# Altium PCB PCB_Input.PcbDoc
Units mil, origin at the board's own origin, x right, y up, seen from the top; angles counter-clockwise.
Board outline 944.88 x 1889.76 mil, 2 copper layers (Top Layer, Bottom Layer); 7 components, 4 nets, 24 pads, 0 vias.
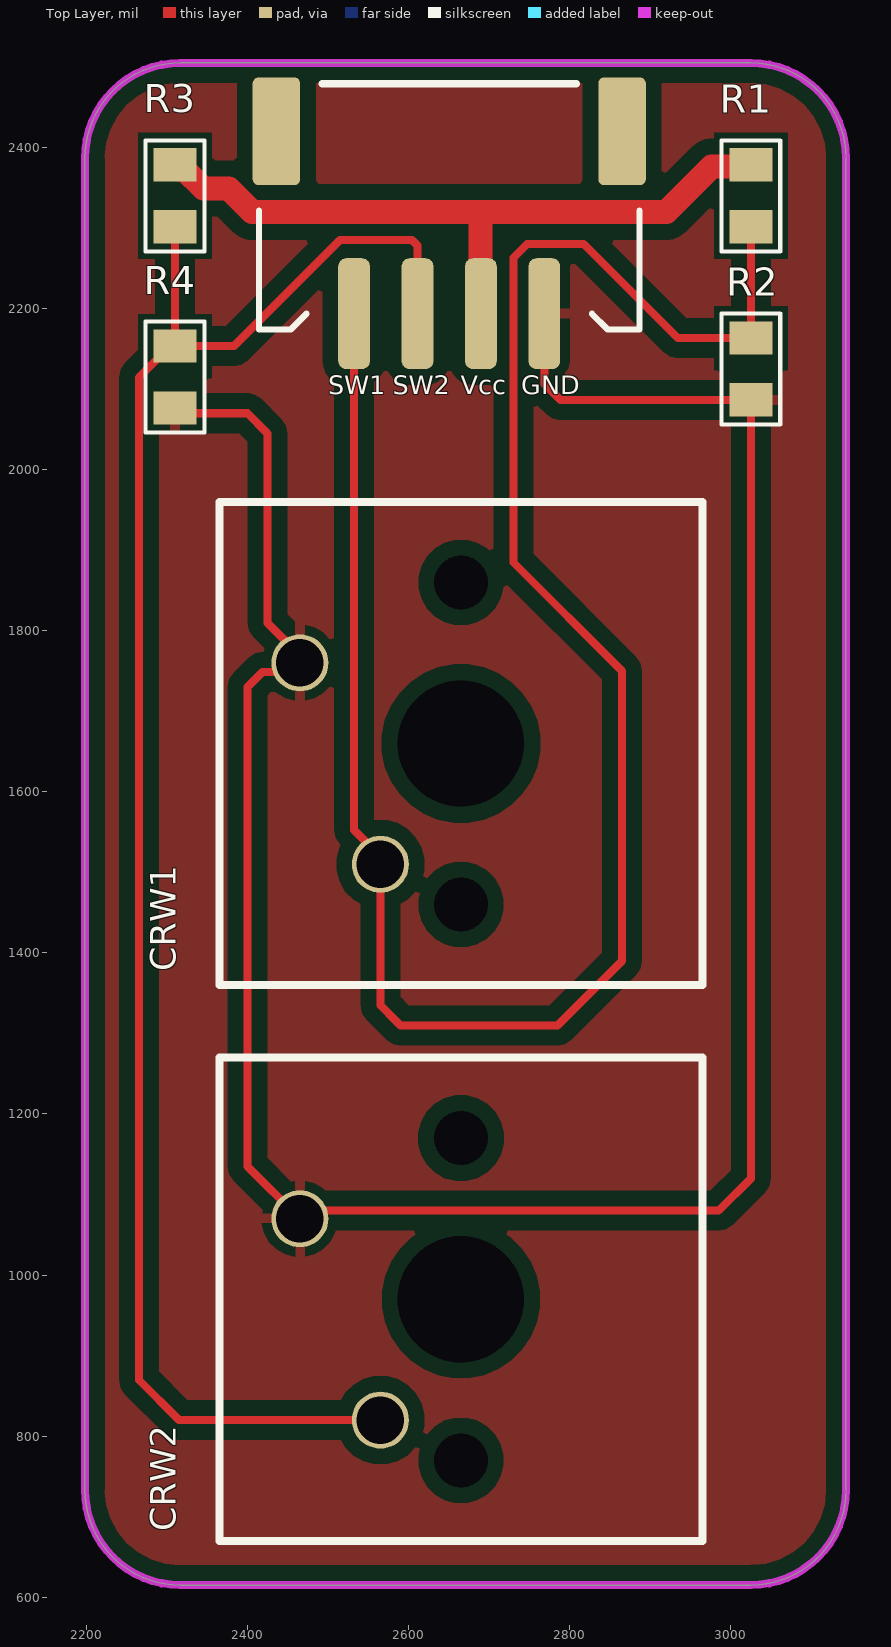
[diagram p0: Top Layer view]
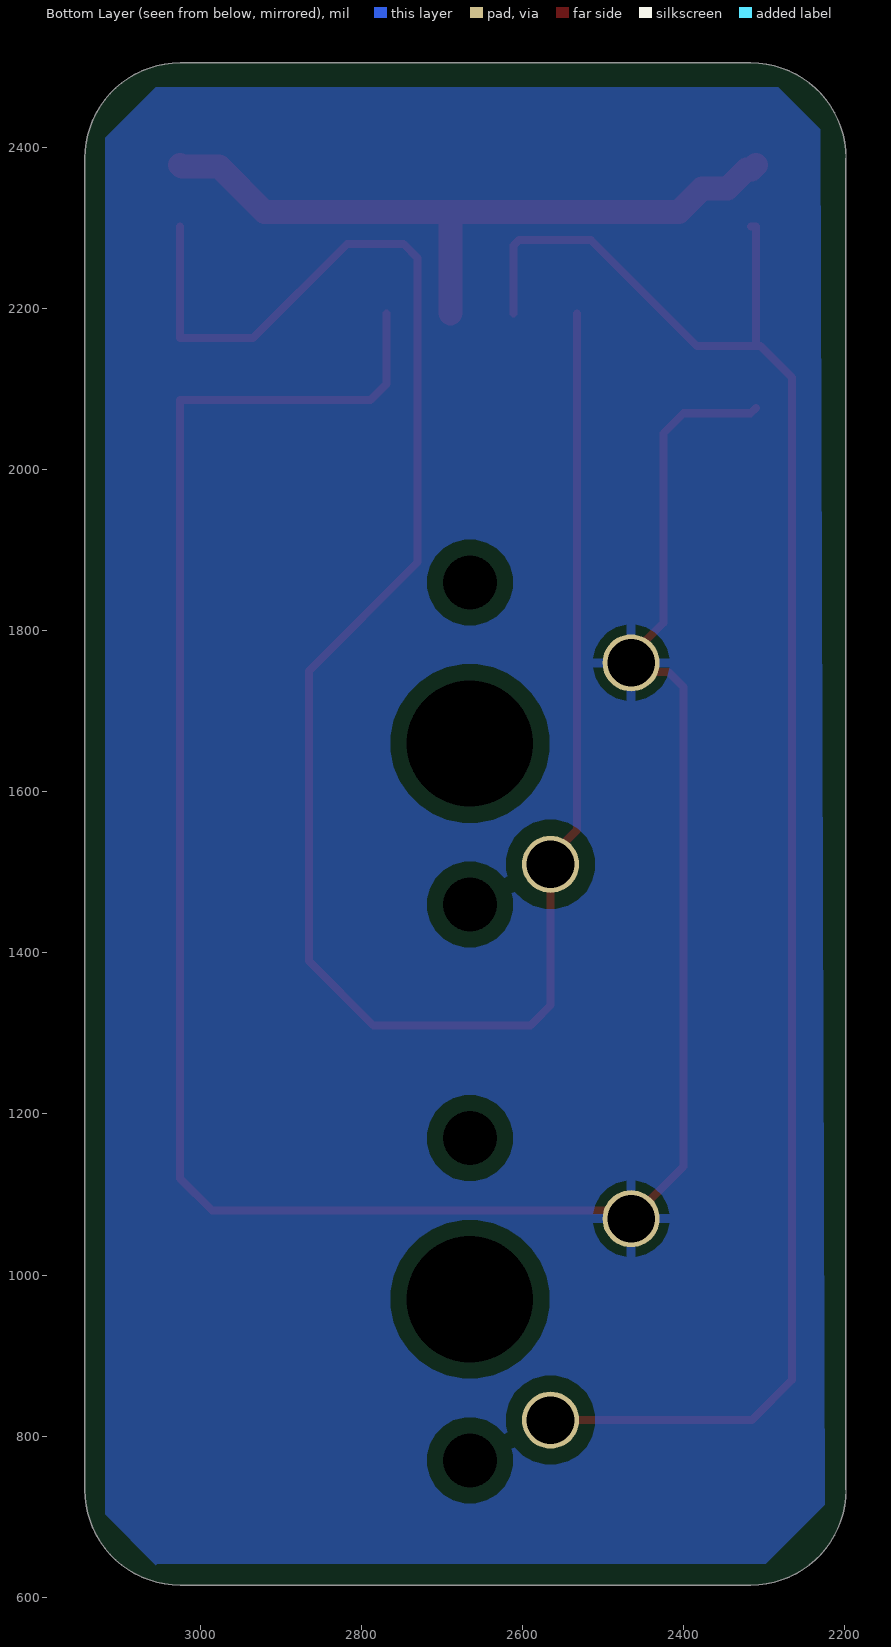
[diagram p1: Bottom Layer view, seen from below]
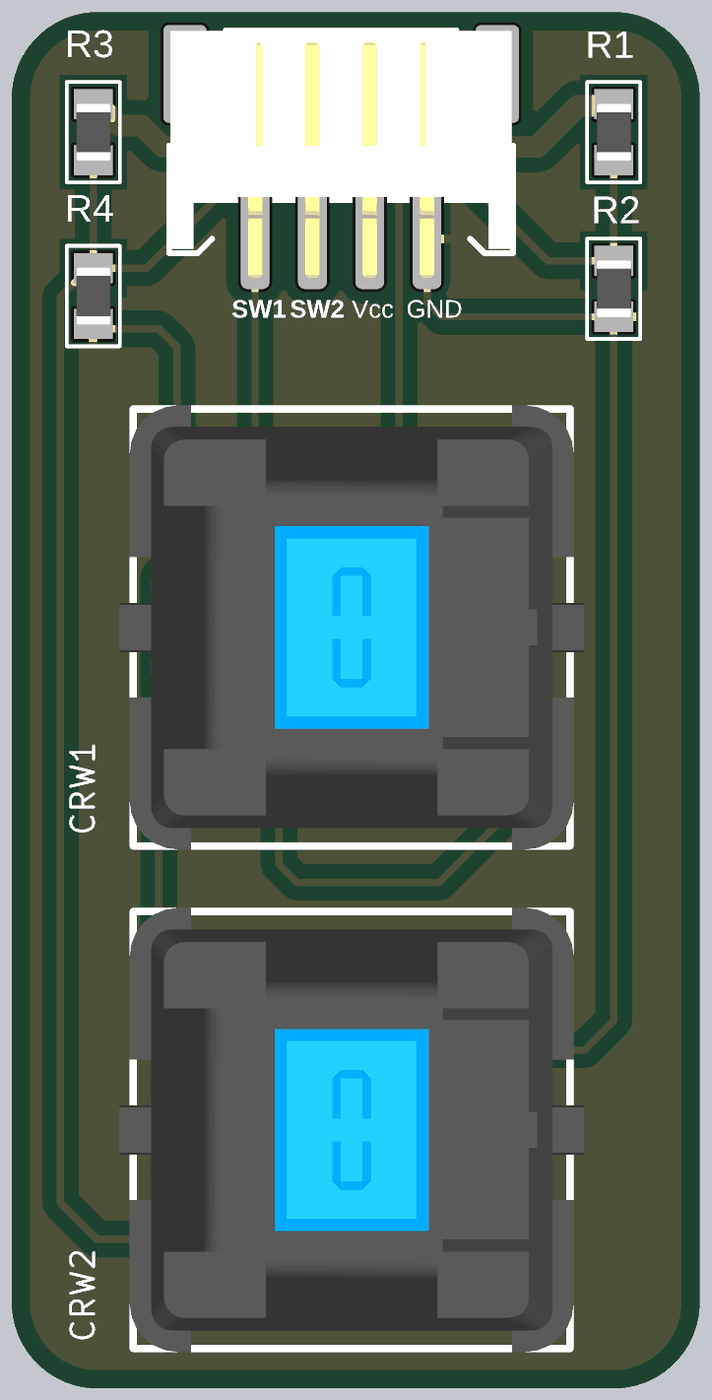
[diagram p2: 3D render of the assembled board from above, using the file's embedded part models]

## Layer stack, top to bottom
Top Solder: solder mask 0.4, Solder Resist, Dk 3.5
Top Layer: signal copper 1.4
Dielectric 1: dielectric 12.6, FR-4, Dk 4.8
Bottom Layer: signal copper 1.4
Bottom Solder: solder mask 0.4, Solder Resist, Dk 3.5

## Board outline
2198.15,733.27 2198.15,2386.81 cw(c2316.26,2386.81) 2316.26,2504.92 3024.92,2504.92 cw(c3024.92,2386.81) 3143.03,2386.81 3143.03,733.27 cw(c3024.92,733.27) 3024.92,615.16 2316.26,615.16 cw(c2316.26,733.27)

## Design rules (kind name [scope] priority, off if disabled: settings)
Clearance Clearance_3 [InComponent('H*')] p1: gap=0 ignorepadtopadclearanceinfootprint=FALSE
Clearance Clearance_2 [InNet('ACL*') OR InNet('ACN*')] p2: gap=13.78 ignorepadtopadclearanceinfootprint=FALSE except(0: Arc-Hole Track-Hole SMDPad-Hole THPad-Hole Via-Hole Fill-Hole Poly-Hole Region-Hole Text-Hole)
Clearance Clearance_1 [InPolygon] p3: gap=19.68 ignorepadtopadclearanceinfootprint=FALSE except(0: Arc-Hole Track-Hole SMDPad-Hole THPad-Hole Via-Hole Fill-Hole Poly-Hole Region-Hole Text-Hole)
Clearance [All] p4: gap=11.81 ignorepadtopadclearanceinfootprint=FALSE except(0: Arc-Hole Track-Hole SMDPad-Hole THPad-Hole Via-Hole Fill-Hole Poly-Hole Region-Hole Text-Hole)
ComponentClearance ComponentClearance_1 [InComponent('M802') OR  InComponent('P104') OR InComponent('Y202') OR InComponent('C101') OR InComponent('P101') OR InComponent('L101') OR  InComponent('S309') OR InComponent('S310') OR InComponent('H*')] p1: gap=0 collisioncheckmode=3 verticalgap=0 showdistances=FALSE
ComponentClearance [All] p2: gap=10 collisioncheckmode=3 verticalgap=10 showdistances=FALSE
Height [All] p1: minheight=0 maxheight=1181.1 prefheight=500
PolygonConnect PolygonConnect_1 [IsVia] p1: connectstyle=Direct reliefconductorwidth=10 reliefentries=4 polygonreliefangle="90 Angle" airgapwidth=10
PolygonConnect PolygonConnect_2 [InNet('GND')] p2: connectstyle=Relief reliefconductorwidth=11.81 reliefentries=4 polygonreliefangle="90 Angle" airgapwidth=11.81
PolygonConnect [All] p3: connectstyle=Relief reliefconductorwidth=15 reliefentries=4 polygonreliefangle="90 Angle" airgapwidth=25
RoutingVias [All] p1: holewidth=15.75 width=31.5 viastyle="Through Hole" minholewidth=11.81 minwidth=23.62 maxholewidth=78.74 maxwidth=196.85
SolderMaskExpansion [All] p1: expansion=4 istentingtop=FALSE
Width [All] p1: maxlimit=1968.5 minlimit=7.87 preferedwidth=11.81
28 further rules are at their usual default settings.

## Classes and differential pairs
component class SCH_Input: CRW2 R1 R2 R3 R4

## Components (designator, comment, footprint, x,y, rotation, side; value= is the part's Value field where it differs from the comment)
CRW1 "" "SPGA48x11 - duplicate" 2665,970 r90 top
CRW2 "" "SPGA48x11 - duplicate" 2665,1660 r90 top
P? "Grove" HDR/Header/4/2mm/BOX/SMD 2650.43,2193.62 r0 top
R1 "10K" "R 0805" 3025,2340 r90 top
R2 "20K" "R 0805" 3025,2125 r90 top
R3 "10K" "R 0805" 2310,2340 r90 top
R4 "20K" "R 0805" 2310,2115 r90 top

## Footprints (in the part's own frame and the unit in brackets; to place one, negate y for a bottom-side part, rotate by r counter-clockwise, add the part's x,y. Pads: shape width x height; smd on the part's side, far side on the other; paste and mask are expansions set on the pad)
HDR/Header/4/2mm/BOX/SMD [mm]
  rrect50% 1x3.5 smd: 1(-3,0) 2(-1,0) 3(1,0) 4(3,0)
  rrect25% 1.5x3.4 smd: SHIELD(-5.45,5.75) SHIELD(5.45,5.75)
  silkscreen extent -6,-0.5 6,7.25, body extent -5.95,-1.35 5.95,7.25, height 4.8
"R 0805" [mm] "Chip Resistor, 2-Leads, Body 2.0x1.3mm, IPC Medium Density"
  rect 1.05x1.35 smd: 1(-0.975,0) 2(0.975,0)
  silkscreen extent -1.75,-0.92 1.75,0.92, body extent -1,-0.61 1,0.59, height 0.5
"SPGA48x11 - duplicate" [mm]
  round 1.8 hole 1.5: 4(-3.81,2.54) 5(2.54,5.08)
  round 1.27 hole 3.988: 11(0,0)
  round 1.27 hole 1.7: ""(-5.08,0)
  oval 0.85x1.27 hole 1.7: ""(5.08,0)
  silkscreen extent -7.62,-7.62 7.62,7.62, body extent -7.75,-8.1 7.75,8.1, height 15.24

## Part data
CRW1 CRW2: library part CR
P?: library part "Header 4", "Header, 4-Pin"
R1 R2 R3 R4: library part Resistor, "Resistor"

## Nets (pads, with @x,y where several pads share a name; then routed paths per layer and width w, separated by ;. In a path a pad name is that pad's centre, name@x,y a point inside that pad or via, vN(x,y) a via of type N, cw(c..) or ccw(c..) an arc to the next point about the centre after c; other vN are vias at no path point)
GND: CRW1.5 CRW2.5 P?.4 R2.1 R4.1 | length 3093.2
  Top Layer w10: R4.1 2316.61,2070 2400,2070 2425,2045 2425,1809.78 2465,1769.78 CRW2.5 2453.7,1748.7 2418.7,1748.7 2400,1730 2400,1135 CRW1.5 2475,1080 2985,1080 3025,1120 R2.1 2788.39,2086.61 2768.54,2106.46 P?.4
In1: CRW2.4 P?.1 R1.1 R2.2 | length 2633.3
  Top Layer w10: P?.1 2532.32,1552.49 2565,1519.81 CRW2.4 2565,1335 2585.03,1314.97 2590,1310 2785,1310 2865,1390 2865,1750 2730,1885 2730,2262.95 2747.29,2280.24 2817.38,2280.24 2934.23,2163.39 R2.2 R1.1
In2: CRW1.4 P?.2 R3.1 R4.2 | length 2223.2
  Top Layer w10: R3.1@2315.91,2301.61 R3.1 R4.2 ; CRW1.4 2315,820 2265,870 2265,2114.29 2304.09,2153.39 R4.2 ; P?.2 2611.06,2278.08 2604.14,2285 2515,2285 2383.39,2153.39 R4.2
VCC: P?.3 R1.2 R3.2 | length 889.2
  Top Layer w30: R3.2 2315.67,2372.72 2321.57,2372.72 2345.2,2349.09 2376.72,2349.09 2405.82,2320 2689.28,2320 ; P?.3@2689.28,2194.15 2689.28,2320 ; R1.2 3022.87,2376.25 2976.25,2376.25 2920,2320 2689.28,2320
pads on no net: CRW1. CRW1.11 CRW2. CRW2.11 P?.SHIELD

## Polygon pours and split planes (outlines as drawn)
GND on Top Layer "GND_TOP_LAYER_P000" (solid, pour order 0): 2270,2490 2275,2495 3055,2495 3055,2490 3145,2400 3145,705 3140,705 3055,620 2285,620 2205,700 2205,2430
GND on Bottom Layer "GND_BOTTOM_LAYER_P001" (solid, pour order 1): 2229.99,2422.54 2282.45,2475 3055,2475 3117.86,2412.14 3117.86,702.86 3055,640 3053.31,641.69 2298.04,641.69 2224.68,715.05

## Keep-outs
Top Layer:
  the board outline again, w10

## Silkscreen, mask and mechanical layers (free items; w line width, h text height)
Top Overlay:
  text "SW1" at 2500,2085.47 h39.37
  text "SW2" at 2580,2085.47 h39.37
  text "Vcc" at 2665.04,2085.4 h39.37
  text "GND" at 2740,2085.44 h39.37